# Altium PCB PCB1.PcbDoc
Units mil, origin at the board's own origin, x right, y up, seen from the top; angles counter-clockwise.
Board outline 2560 x 2200 mil, 2 copper layers (Top Layer, Bottom Layer), stack 65.792 mil thick; 31 components, 26 nets, 88 pads, 0 vias.
Unrouted connection lines stored in the file: 2.
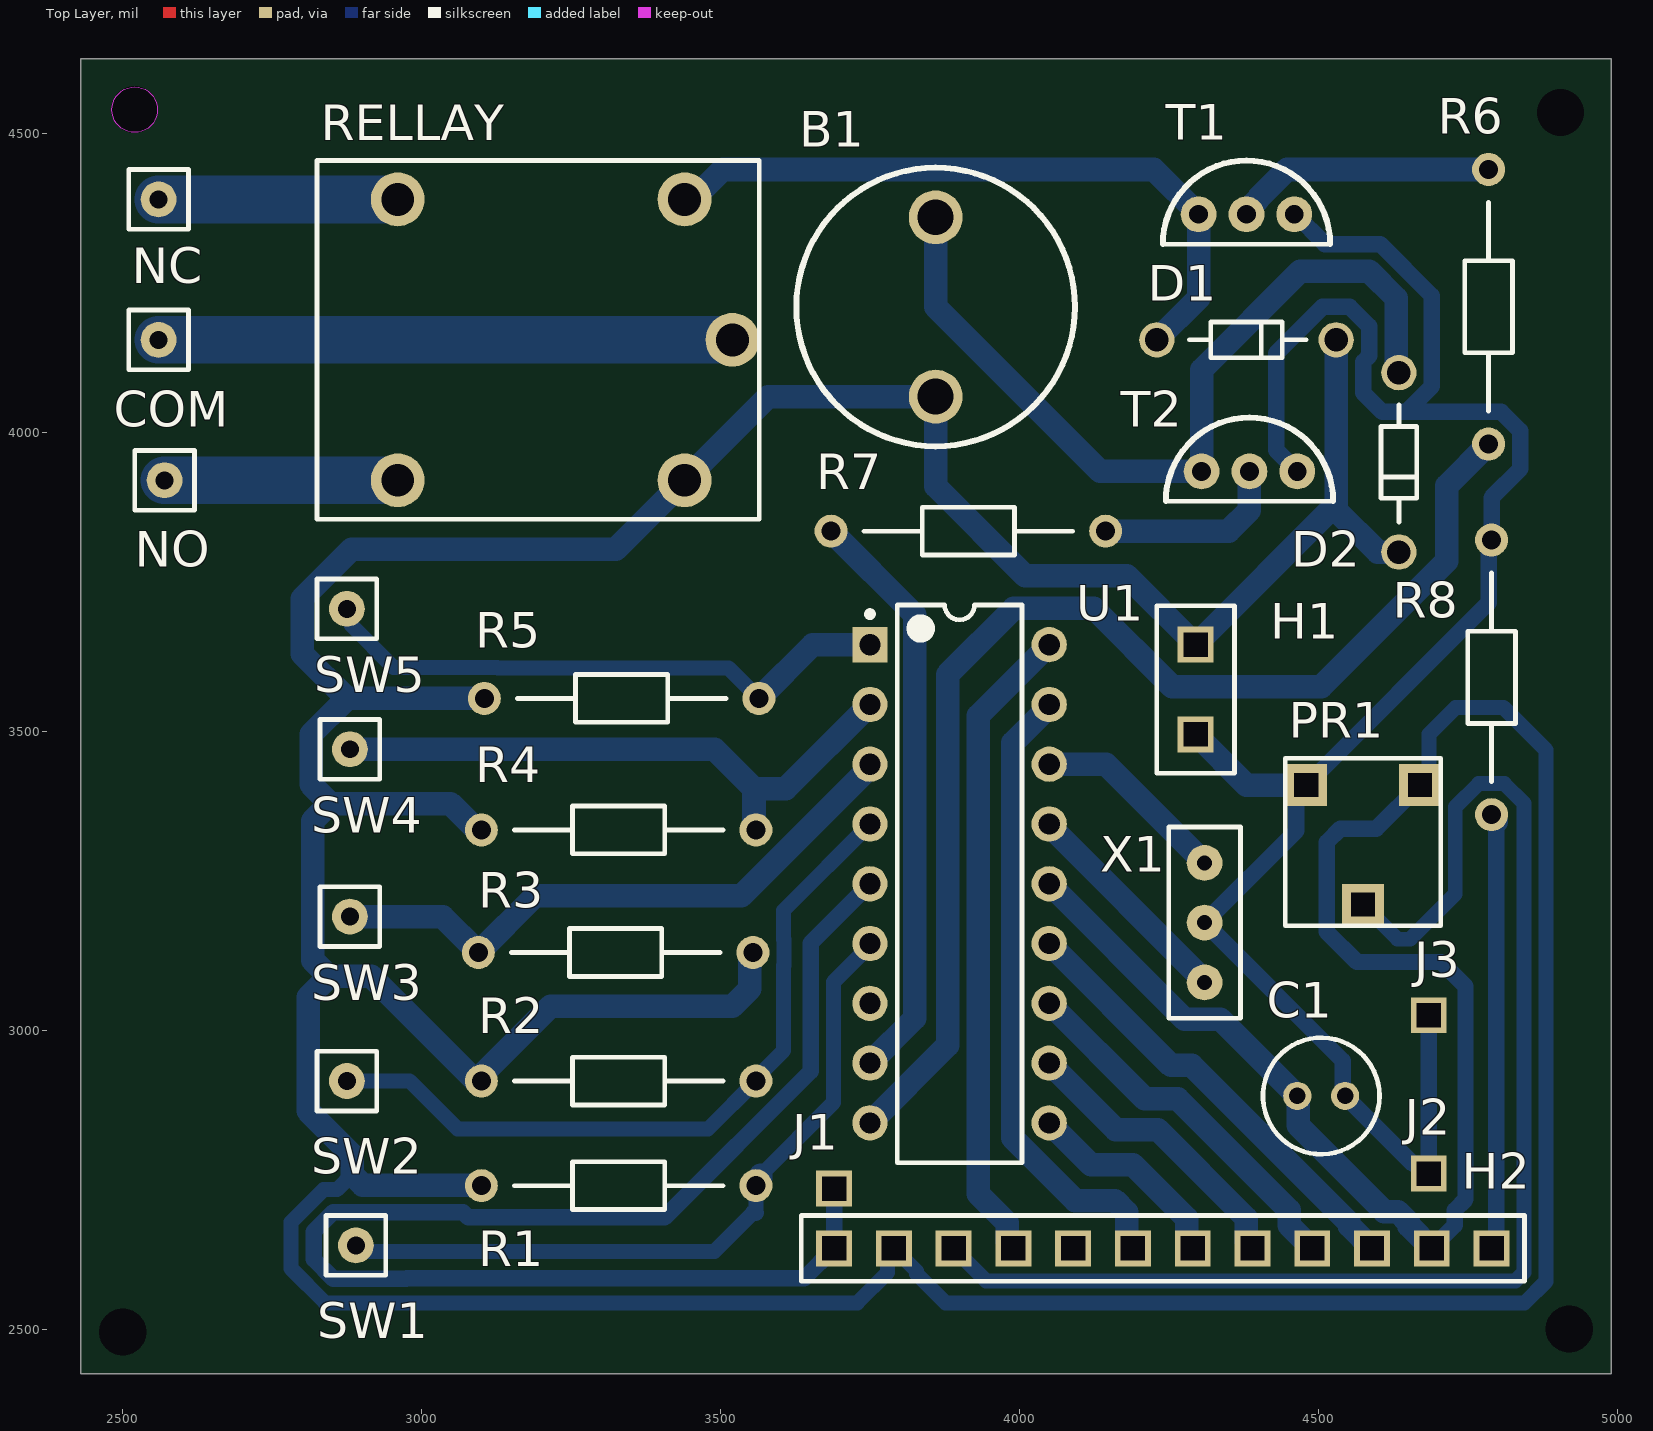
[diagram p0: Top Layer view]
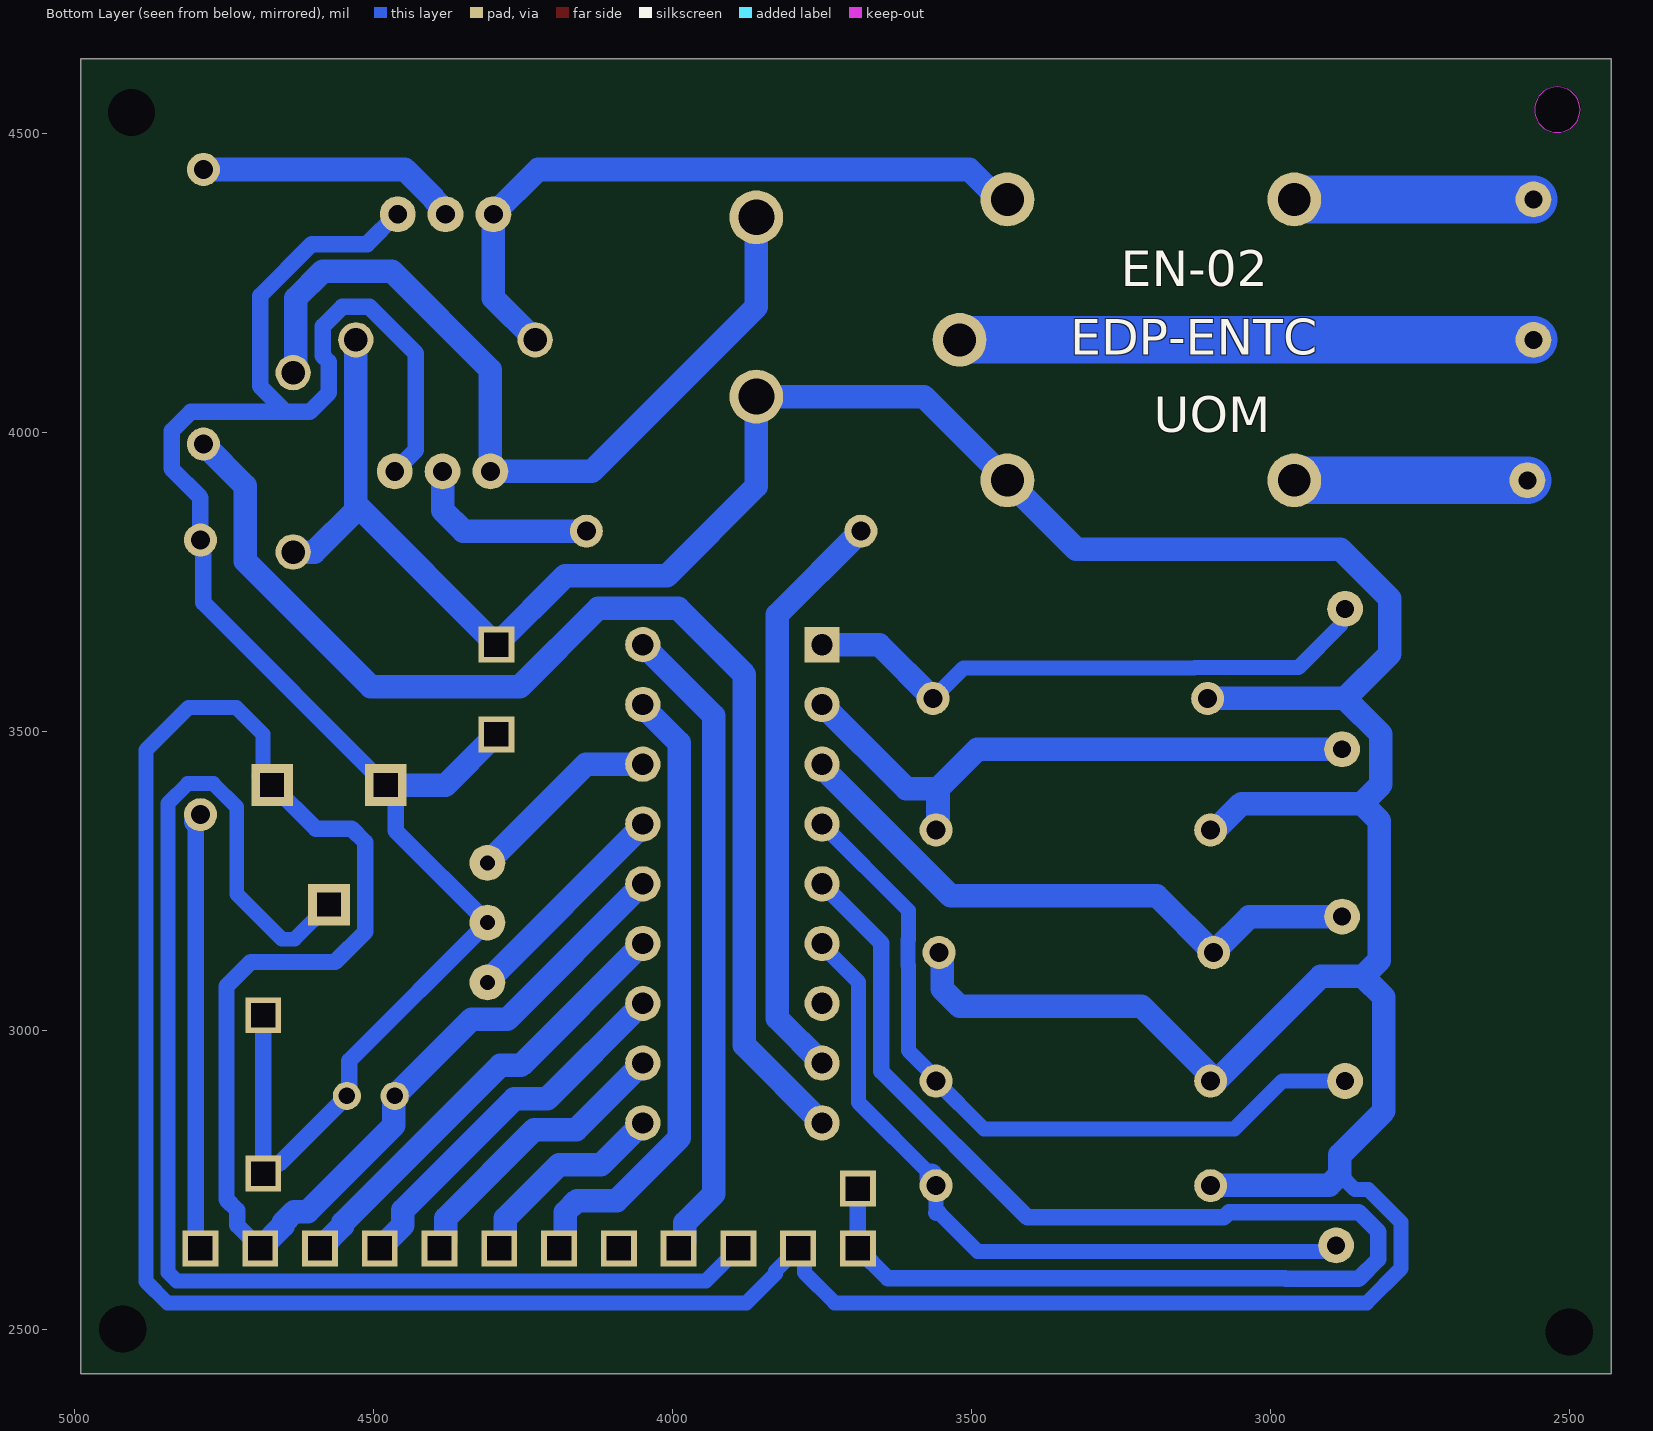
[diagram p1: Bottom Layer view, seen from below]

## Layer stack, top to bottom
Top Solder: solder mask 0.4, Solder Resist, Dk 3.5
Top Layer: signal copper 1.4
Dielectric 1: dielectric 62.9921, FR-4, Dk 4.8
Bottom Layer: signal copper 1.4
Bottom Solder: solder mask 0.4, Solder Resist, Dk 3.5

## Board outline
4990,4625 4990,2425 2430,2425 2430,4625
cut-out: 2520,4501.92 cw(c2520,4540) 2481.92,4540 cw(c2520,4540) 2520,4578.08 cw(c2520,4540) 2558.08,4540 cw(c2520,4540)
board region "Default Layer Stack Region": 4990,4625 4990,2425 2430,2425 2430,4625
board region "Layer Stack Region 1": 4990,4625 4990,2425 2430,2425 2430,4625

## Design rules (kind name [scope] priority, off if disabled: settings)
Clearance [All] p1: gap=11.81 ignorepadtopadclearanceinfootprint=FALSE
PolygonConnect [All] p1: connectstyle=Relief reliefconductorwidth=10 reliefentries=4 polygonreliefangle="90 Angle" airgapwidth=10
RoutingVias [All] p1: holewidth=28 width=50 viastyle="Through Hole" minholewidth=28 minwidth=50 maxholewidth=28 maxwidth=50
SilkToSolderMaskClearance [IsPad] p1: minsilkscreentomaskgap=3.94 clearancetoexposedcopper=TRUE
SolderMaskExpansion [All] p1: expansion=4 istentingtop=FALSE
Width [All] p1: maxlimit=80 minlimit=11.81 preferedwidth=39.37
29 further rules are at their usual default settings.

## Components (designator, comment, footprint, x,y, rotation, side; value= is the part's Value field where it differs from the comment)
B1 "BUZZER" BUZZER 3860,4210 r90 top
C1 "0.1uF" CAP0.1UF 4465,2890 r0 top
COM "switch" SW 2560,4155 r0 top (schematic designator SW8)
D1 "1N4001" DIODE 4230,4155 r0 top
D2 "1N4001" DIODE 4635,4100 r270 top
H1 "5V" 2PINHEADER 4295,3645 r270 top
H2 "DISPLAY" 12PINHEADER 3990,2635 r0 top
J1 "" JUMPER 3690,2735 r0 top
J2 "" JUMPER 4685,2760 r0 top
J3 "" JUMPER 4685,3025 r0 top
NC "switch" SW 2560,4390 r0 top (schematic designator SW7)
NO "switch" SW 2570,3920 r0 top (schematic designator SW6)
PR1 "10K" POT 4575,3210 r180 top
R1 "10K" RESI 3559.33,2740 r180 top
R2 "10K" RESI 3559.33,2915 r180 top
R3 "10K" RESI 3095,3130 r0 top
R4 "10K" RESI 3559.33,3335 r180 top
R5 "10K" RESI 3564.33,3555 r180 top
R6 "10K" RESI 4785,4440 r270 top
R7 "10K" RESI 4144.33,3835 r180 top
R8 "47R" RESI 4790,3820 r270 top (schematic designator RE8)
RELLAY "5V" RELAY 3520,4155 r90 top
SW1 "switch" SW 2890,2640 r0 top
SW2 "switch" SW 2875,2915 r0 top
SW3 "switch" SW 2880,3190 r0 top
SW4 "switch" SW 2880,3470 r0 top
SW5 "switch" SW 2875,3705 r0 top
T1 "2N2222" 2N2222 4380,4365 r180 top
T2 "2N2222" 2N2222 4385,3935 r180 top
U1 "PIC16F628A-I/P" PDIP300-P18 3900,3245 r0 top
X1 "4MHz" "RES 4MHZ" 4310,3180 r90 top

## Footprints (in the part's own frame and the unit in brackets; to place one, negate y for a bottom-side part, rotate by r counter-clockwise, add the part's x,y. Pads: shape width x height; smd on the part's side, far side on the other; paste and mask are expansions set on the pad)
2N2222 [mil]
  round 60 hole 31.5: 1(0,0) 2(80,0) 3(-80,0)
  silkscreen extent -140,-90 140,50, body extent -80,-85 80,35, height 150
2PINHEADER [mil]
  rect 60x60 hole 40 square: 1(0,0) 2(150,0)
  silkscreen extent -65,-65 215,65, body extent -50,-50 200,50, height 317
12PINHEADER [mil]
  rect 60x60 hole 40 square: 1(-300,0) 2(-200,0) 3(-100,0) 4(0,0) 5(100,0) 6(200,0) 7(300,0) 8(400,0) 9(500,0) 10(600,0) 11(700,0) 12(800,0)
  silkscreen extent -355,-55 855,55, body extent -350,-50 850,50, height 317
BUZZER [mil]
  round 90 hole 60: 1(-150,0) 2(150,0)
  silkscreen extent -233,-233 233,233, body extent -236,-235 236,237, height 375
CAP0.1UF [mm]
  round 1.2 hole 0.7: 1(0,0) 2(2.032,0)
  silkscreen extent -1.46,-2.48 3.49,2.48, body extent -1.5,-2.46 3.53,2.54, height 12.51
DIODE [mm]
  round 1.5 hole 1: A(0,0) K(7.62,0)
  silkscreen extent 1.37,-0.76 6.35,0.76, body extent -0.26,-1.27 7.88,1.26, height 1.27
JUMPER [mil]
  rect 60x60 hole 40 square: 1(0,0)
PDIP300-P18 [mm] "DIP, 18-Pin, Row Spacing 7.62 mm, Pitch 2.54 mm"
  rect 1.5x1.5 hole 0.9: 1(-3.81,10.16)
  round 1.5 hole 0.9: 2(-3.81,7.62) 3(-3.81,5.08) 4(-3.81,2.54) 5(-3.81,0) 6(-3.81,-2.54) 7(-3.81,-5.08) 8(-3.81,-7.62) 9(-3.81,-10.16) 10(3.81,-10.16) 11(3.81,-7.62) 12(3.81,-5.08) 13(3.81,-2.54) 14(3.81,0) 15(3.81,2.54) 16(3.81,5.08) 17(3.81,7.62) 18(3.81,10.16)
  silkscreen extent -3.93,-11.85 2.65,11.85, body extent -3.6,-11.8 3.6,11.8, height 5.33
POT [mil]
  rect 70x70 hole 39.37 square: 1(-95,-200) 2(0,0) 3(95,-200)
  silkscreen extent -130,-245 130,35, body extent -128,-245 128,33, height 166
RELAY [mil]
  round 90 hole 55: 1(-235,80) 2(235,80) 3(235,560) 4(0,0) 5(-235,560)
  silkscreen extent -300,-45 300,695, body extent -295,-40 295,688, height 571
"RES 4MHZ" [mil]
  round 60 hole 25: 1(-100,0) 2(0,0) 3(100,0)
  silkscreen extent -160,-60 160,60, body extent -159,-59 156,59, height 236
RESI [mm]
  round 1.4 hole 0.8: 1(0,0) 2(11.667,0)
  silkscreen extent 1.4,-1.02 10.27,1.02, body extent -0.31,-1.29 11.99,1.29, height 2.58
SW [mil]
  round 60 hole 30: 1(0,0)
  silkscreen extent -50,-50 50,50

## Part data
B1: library part CEM-1206S, "12 mm, 5 V, 85 dB, Through Hole, Sealed, Magnetic Audio Transducer Buzzer", Case/Package=Radial, Frequency=2.4kHz, Manufacturer=CUI, Max Operating Temperature=70°C, Min Operating Temperature=-30°C, Operating Supply Current=45mA, Supplier Part Number 1=CEM-1206S-TRAY, Voltage Rating=5V, Category="Audio Products", ComponentLink1Description=http://www.mouser.com/ds/2/670/cem-1206s-515977.pdf?src-supplier=Mouser, ComponentLink1URL=http://www.mouser.com/ds/2/670/cem-1206s-515977.pdf?src-supplier=Mouser, ComponentLink2Description=https://www.cui.com/product/resource/digikeypdf/cem-1206s.pdf?src-supplier=Digi-Key, ComponentLink2URL=https://www.cui.com/product/resource/digikeypdf/cem-1206s.pdf?src-supplier=Digi-Key, Diameter=12mm, Height=10mm, Lead Free="Lead Free", Manufacturer Part Number=CEM-1206S, Mount="Through Hole", Packaging=Bulk, RoHS=Yes, Self Resonant Frequency=2.4kHz, Sensing Method=Magnetic, Supplier 1="Future Electronics", Termination="PC Pins", Washable=Yes
C1: library part UKW1H0R1MDD1TD, "Cap Alum 0.1UF 20% 50V Radial", Capacitance=100nF, Case/Package=Radial, Manufacturer=Nichicon, Max Operating Temperature=85°C, Min Operating Temperature=-40°C, Package Quantity=1, Ripple Current=1.1mA, Supplier Part Number 1=493-10793-1-ND, Tolerance=20%, Voltage Rating=50V, Category="Aluminum Electrolytic Capacitors", ComponentLink1Description=https://datasheet.ciiva.com/29550/e-kw-29550927.pdf?src-supplier=Digi-Key, ComponentLink1URL=https://datasheet.ciiva.com/29550/e-kw-29550927.pdf?src-supplier=Digi-Key, Height - Seated (Max)=0.492inch, Lead Pitch=0.079inch, Life (Hours)=2000Hour, Manufacturer Part Number=UKW1H0R1MDD1TD, Mount="Through Hole", Packaging="Cut Tape", Pricing 1="1=0.39000, 10=0.26600, 50=0.17720, 100=0.15050, 500=0.10626, 1000=0.09298 (USD)", RoHS=Yes, RoHS Compliant=Yes, Stock 1=3707, Supplier 1=Digi-Key
COM NC NO SW1 SW2 SW3 SW4 SW5: library part Switch, "SWITCH PUSH SPST-NO 16A 125V"
D1 D2: "Diode Standard 50 V 1A Through Hole DO-204AL (DO-41)"
H1: library part 5VHEADER
H2: library part 12PINHEADER
J1 J2 J3: library part JUMPER
PR1: library part POT, "CARBON PRESET HA 06 SM065 10K 30"
R1 R2 R3 R4 R5 R6 R7: library part CFR-25JB-52-10K, "RES 10K OHM 5% 1/2W AXIAL", Case/Package=Axial, Manufacturer=Yageo, Max Operating Temperature=155°C, Max Power Dissipation=250mW, Min Operating Temperature=-55°C, Package Quantity=200, Resistance=10kR, Resistor Type="Carbon Film", Supplier Part Number 1=10KQBK-ND, Temperature Coefficient=500ppm/°C, Tolerance=5%, Category="Through-Hole Resistors", ComponentLink1Description=http://www.yageo.com/NewPortal/yageodocoutput?fileName=/pdf/throughhole/Yageo_LR_CFR_2013.pdf&src-supplier=Digi-Key, ComponentLink1URL=http://www.yageo.com/NewPortal/yageodocoutput?fileName=/pdf/throughhole/Yageo_LR_CFR_2013.pdf&src-supplier=Digi-Key, Lead Free="Lead Free", Length=0.248inch, Manufacturer Part Number=CFR-25JB-52-10K, Number of Terminations=2, Packaging=Bulk, Pricing 1="1=0.10000, 10=0.06800, 25=0.04680, 50=0.03640, 100=0.02600, 250=0.02028, 500=0.01612, 1000=0.01144, 5000=0.00884 (USD)", RoHS=Yes, RoHS Compliant=Yes, Series="Carbon Film", Stock 1=199228, Supplier 1=Digi-Key
R8: library part CFR-25JB-52-47R, "RES 47 OHM 5% 1/4W AXIAL", Case/Package=Axial, Manufacturer=Yageo, Max Operating Temperature=155°C, Max Power Dissipation=250mW, Min Operating Temperature=-55°C, Package Quantity=200, Resistor Type="Carbon Film", Supplier Part Number 1=47QBK-ND, Temperature Coefficient=500ppm/°C, Tolerance=5%, Category="Through-Hole Resistors", ComponentLink1Description=http://www.yageo.com/NewPortal/yageodocoutput?fileName=/pdf/throughhole/Yageo_LR_CFR_2013.pdf&src-supplier=Digi-Key, ComponentLink1URL=http://www.yageo.com/NewPortal/yageodocoutput?fileName=/pdf/throughhole/Yageo_LR_CFR_2013.pdf&src-supplier=Digi-Key, Lead Free="Lead Free", Length=0.248inch, Manufacturer Part Number=CFR-25JB-52-47R, Number of Terminations=2, Packaging=Bulk, Pricing 1="1=0.10000, 10=0.06800, 25=0.04680, 50=0.03640, 100=0.02600, 250=0.02028, 500=0.01612, 1000=0.01144, 5000=0.00884 (USD)", Resistance=47R, RoHS=Yes, RoHS Compliant=Yes, Series="Carbon Film", Stock 1=40208, Supplier 1=Digi-Key
RELLAY: library part J1021AS55VDC.45, "RELAY GEN PURPOSE SPST 5A 5V", Manufacturer="CIT Relay & Switch", Supplier Part Number 1=2449-J1021AS55VDC.45-ND, Manufacturer Part Number=J1021AS55VDC.45, Pricing 1="1=1.06000, 10=0.99200, 25=0.88200, 50=0.83800, 100=0.79380, 250=0.70560, 450=0.66151, 950=0.61740, 9800=0.58653 (USD)", RoHS=No, Stock 1=1912, Supplier 1=Digi-Key
T1 T2: "TRANS NPN 30V 0.8A TO18", Case/Package=TO-18, Manufacturer="ON Semiconductor / Fairchild", Supplier Part Number 1=2N2222-DIE-ND, Category=BJTs, ComponentLink1Description=https://datasheet.ciiva.com/14850/38228mot-14850663.pdf?src-supplier=Arrow+Electronics, ComponentLink1URL=https://datasheet.ciiva.com/14850/38228mot-14850663.pdf?src-supplier=Arrow+Electronics, Lead Free="Contains Lead", Manufacturer Part Number=2N2222, Number of Pins=3, Packaging=Bulk, RoHS=No, RoHS Compliant=No, Supplier 1=Digi-Key
U1: library part MC-8B-16F627A-IL18, "FLASH-Based 8-Bit CMOS Microcontroller with nanoWatt Technology, 2K (x14-Bit words) FLASH, 224 Bytes SRAM, 18-Pin PDIP, 3.0 to 5.5V Supply Range, Industrial Temperature", Code_JEDEC=MS-001, DatasheetVersion="revF, Mar-2007", PackageDescription="18-Lead Plastic Dual In-Line (P) - 300 mil Body [PDIP]", PackageReference=PDIP300-P18, PackageVersion="revBB, Aug-2009"
X1: library part CSTLS4M00G53-B0, "CER RES 4.0000MHZ 15PF T/H", Capacitance=15pF, Case/Package=Radial, Frequency Stability=0.2%, Frequency Tolerance=0.5%, Manufacturer=Murata, Max Operating Temperature=80°C, Min Operating Temperature=-20°C, Operating Frequency="4 MHz", Package Quantity=500, Resistor Type=Ceramic, Supplier Part Number 1=490-1208-ND, Category=Capacitors, ComponentLink1Description=https://datasheet.ciiva.com/19454/1852096-19454652.pdf?src-supplier=Jameco, ComponentLink1URL=https://datasheet.ciiva.com/19454/1852096-19454652.pdf?src-supplier=Jameco, ComponentLink2Description=https://datasheet.ciiva.com/18026/getdatasheetpartid-104166-18026389.pdf?src-supplier=Verical, ComponentLink2URL=https://datasheet.ciiva.com/18026/getdatasheetpartid-104166-18026389.pdf?src-supplier=Verical, ComponentLink3Description=https://datasheet.ciiva.com/46434/45562-46434823.pdf?src-supplier=Element14, ComponentLink3URL=https://datasheet.ciiva.com/46434/45562-46434823.pdf?src-supplier=Element14, ComponentLink4Description=https://datasheet.ciiva.com/884/p16e-884528.pdf?src-supplier=Digi-Key, ComponentLink4URL=https://datasheet.ciiva.com/884/p16e-884528.pdf?src-supplier=Digi-Key, ComponentLink5Description=https://datasheet.ciiva.com/16427/p16e-16427178.pdf?src-supplier=Future+Electronics, ComponentLink5URL=https://datasheet.ciiva.com/16427/p16e-16427178.pdf?src-supplier=Future+Electronics, Contact Plating=Copper,Tin, Frequency=4MHz, Height=0.236inch, Impedance=30R, Lead Free="Lead Free", Length=0.315inch, Load Capacitance=15pF, Manufacturer Part Number=CSTLS4M00G53-B0, Mount="Through Hole", Number of Pins=3, Packaging=Bulk, Pricing 1="1=0.20000, 10=0.16300, 50=0.14640, 100=0.13010, 500=0.12358, 1000=0.10407, 2500=0.09757, 5000=0.09431, 10000=0.09106 (USD)", REACH SVHC="No SVHC", RoHS=Yes, RoHS Compliant=Yes, Self Resonant Frequency=4MHz, Series=CERALOCK®, Stock 1=14887, Supplier 1=Digi-Key, Termination="Through Hole", Tolerance=0.5%, Width=0.118inch

## Free pads (board coordinates)
  round 0 hole 78.74: 4(2520,4540) 5(4905,4535) 6(2500,2495) 7(4920,2500)

## Nets (pads, with @x,y where several pads share a name; then routed paths per layer and width w, separated by ;. In a path a pad name is that pad's centre, name@x,y a point inside that pad or via, vN(x,y) a via of type N, cw(c..) or ccw(c..) an arc to the next point about the centre after c; other vN are vias at no path point)
+5V5: B1.1 C1.1 D1.K D2.K H1.1 H2.2 H2.11 PR1.1 R1.2 R2.2 R3.2 R4.2 R5.2 RELLAY.1 U1.14 | length 11047.7
  Bottom Layer w25: 2883.69,2758.69 2858.68,2733.68 2836.2,2733.68 2781.32,2678.8 2781.32,2601.2 2838.64,2543.88 3728.88,2543.88 3779.69,2594.69 H2.2@3779.69,2624.69 ; H2.2 3828.15,2596.85 3828.15,2592.3 3876.58,2543.88 4845.32,2543.88 4881.12,2579.68 4881.12,3468.88 4810,3540 4730,3540 4685.31,3495.31 PR1.1@4685.31,3425.31
  Bottom Layer w27.37: PR1.1 4597.34,3337.34 4537.4,3337.34 4514.5,3314.45 4514.5,3164.44 4564.79,3114.15 4705.85,3114.15 4746.5,3073.5 4746.5,2716.95 4728.5,2698.96 4728.5,2673.5 H2.11
  Bottom Layer w27.56: R4.2@3092.54,3335 R4.2 ; R3.2@3549.06,3124.73 R3.2
  Bottom Layer w39.37: R4.2@3092.54,3335 3048.3,3379.25 2846.9,3379.25 ; R1.2 3099.13,2740.87 2901.52,2740.87 2883.69,2758.69 2883.69,2791.31 2810,2865 2810,3055 2845,3090 ; R5.2 2875,3555 ; R3.2@3549.06,3124.73 3549.06,3069.06 3520,3040 3215.67,3040 3090.67,2915 2915.67,3090 2845,3090 ; H2.2@3779.69,2624.69 H2.2 ; U1.14 4276.5,3018.5 4336.5,3018.5 C1.1 4466.51,2888.49 4466.51,2840.65 4610.66,2696.5 4633.05,2696.5 4651.85,2677.7 4651.85,2673.15 H2.11 ; D1.K 4530,3880 ; D2.K 4600,3800 4530,3870 4530,3880 ; PR1.1 PR1.1@4685.31,3425.31 ; 2845,3090 2817.65,3117.35 2817.65,3350 2846.9,3379.25 ; 2846.9,3379.25 2815,3411.14 2815,3495 2875,3555 ; 2875,3555 2800,3630 2800,3721.94 2883.06,3805 3325,3805 3580,4060 B1.1 3860,3910 4010,3760 4180,3760 H1.1 4530,3880
GND: C1.2 H1.2 H2.1 H2.5 J1.1 J2.1 J3.1 PR1.3 R8.1 T1.3 T2.3 U1.5 X1.2 | length 5816.2
  Top Layer w27.56: U1.5@3749.41,3245.59 U1.5 ; T1.3 T1.3@4462.5,4362.5 ; T2.3@4462.5,3937.5 T2.3 ; PR1.3@4463.66,3393.66 PR1.3 ; C1.2@4541.23,2893.77 C1.2
  Bottom Layer w27.56: J1.1 H2.1 3640,2585 2975,2585 2974.41,2584.41 2851.97,2584.41 2819.41,2616.97 2819.41,2663.03 2851.97,2695.59 3069.24,2695.59 3077.98,2686.85 3406.35,2686.85 3650.89,2931.39 3650.89,3145.89 U1.5 ; T1.3 4461.44,4365 4511.16,4315.28 4603.75,4315.28 4690.12,4228.91 4690.12,4077.17 4647.41,4034.47 ; T2.3 4430,3970 4430,4132.95 4507.17,4210.12 4552.83,4210.12 4585.12,4177.83 4585.12,4128.07 4575.28,4118.22 4575.28,4066.25 4607.06,4034.47 4647.41,4034.47 ; J3.1 J2.1 4668.78,2776.22 4658.78,2776.22 C1.2 4541.23,2893.77 4541.23,2948.77 X1.2 4463.66,3333.66 4463.66,3393.66 PR1.3 4785,3715 4785,3815 R8.1 4790,3891 4838.15,3939.15 4838.15,4002.68 4806.37,4034.47 4647.41,4034.47
  Bottom Layer w39: H1.2 4380,3410 PR1.3
NetB1_2: B1.2 D2.A T2.2 | length 1421.9
  Bottom Layer w39.37: B1.2 3860,4210 4135,3935 T2.2 4305,4105 4470,4270 4585,4270 4630.39,4224.61 4630.39,4118.53 4631.23,4117.69 4631.23,4095.68 D2.A@4630.39,4094.84
NetD1_2: D1.A RELLAY.2 T1.2 | length 1150.8
  Bottom Layer w39.37: RELLAY.2 3453.7,4390 3503.7,4440 4225,4440 T1.2 4300,4225 D1.A
NetH2_3: H2.3 PR1.2 | length 2267.4
  Bottom Layer w25: H2.3 3944.31,2580.69 4830.07,2580.69 4844.31,2594.93 4844.31,3379.71 4811.49,3412.54 4768.51,3412.54 4729.31,3373.34 4729.31,3227.89 4653.57,3152.14 4632.86,3152.14 PR1.2
NetH2_4: H2.4 U1.18 | length 1086.8
  Bottom Layer w39.37: H2.4 3979.69,2645.31 3979.69,2677.68 3931.18,2726.18 3931.18,3526.18 U1.18 U1.18@4050,3641.77
NetH2_6: H2.6 U1.17 | length 1057.4
  Bottom Layer w39.37: U1.17 4050,3541.77 3988.98,3480.75 3988.98,2819.72 4093.7,2715 4160,2715 4179.69,2695.31 4179.69,2645.31 H2.6
NetH2_7: H2.7 U1.10 | length 350.4
  Bottom Layer w39.37: U1.10 4120,2775 4190,2775 4279.69,2685.31 4279.69,2645.31 H2.7
NetH2_8: H2.8 U1.11 | length 492
  Bottom Layer w39.37: U1.11 4161.18,2833.82 4231.42,2833.82 4379.69,2685.55 4379.69,2645.31 H2.8
NetH2_9: H2.9 U1.12 | length 624.5
  Bottom Layer w39.37: U1.12 4210,2885 4265,2885 4451.5,2698.5 4451.5,2673.5 H2.9
NetH2_10: H2.10 U1.13 | length 753.9
  Bottom Layer w39.37: U1.13 4253.82,2941.18 4288.36,2941.18 4551.85,2677.7 4551.85,2673.15 H2.10
NetH2_12: H2.12 R8.2 | length 732
  Bottom Layer w27.37: H2.12@4797.68,2642.68 R8.2@4797.68,3348.73
  Bottom Layer w39.37: H2.12 H2.12@4797.68,2642.68 ; R8.2 4790,3356.41 R8.2@4797.68,3348.73
NetR1_1: R1.1 SW1.1 U1.6 | length 1229.4
  Bottom Layer w25: SW1.1 2900,2630 3490,2630 3555,2695 ; 3559.33,2695 R1.1 R1.1@3559.33,2744.26 ; R1.1@3567.2,2757.2 3688.98,2878.98 3688.98,3080.75 U1.6@3750,3141.77
  Bottom Layer w27.56: 3555,2695 3559.33,2695
  Bottom Layer w39.37: R1.1@3559.33,2744.26 3567.2,2752.14 R1.1@3567.2,2757.2 ; U1.6@3750,3141.77 U1.6
NetR2_1: R2.1 SW2.1 U1.4 | length 1260.1
  Bottom Layer w25: SW2.1 2980,2915 3060,2835 3479.33,2835 R2.1 ; R2.1@3559.33,2919.84 3605.63,2966.14 3605.63,3107.94 3606.2,3108.51 3606.2,3151.49 3605.63,3152.06 3605.63,3200.63 U1.4
  Bottom Layer w27.56: R2.1 R2.1@3559.33,2919.84
NetR3_1: R3.1 SW3.1 U1.3 | length 1028.3
  Bottom Layer w27.56: U1.3@3750,3440 U1.3
  Bottom Layer w39.37: SW3.1 3035,3190 R3.1 3190,3225 3535,3225 U1.3@3750,3440
NetR4_1: R4.1 SW4.1 U1.2 | length 1026.1
  Bottom Layer w27.56: R4.1@3556.1,3338.23 R4.1
  Bottom Layer w39.37: SW4.1 3490,3470 3556.1,3403.9 ; R4.1@3556.1,3338.23 3556.1,3403.9 ; U1.2 3608.9,3403.9 3556.1,3403.9
NetR5_1: R5.1 SW5.1 U1.1 | length 986.1
  Bottom Layer w25: SW5.1 2881.7,3698.3 2881.7,3678.3 2953.13,3606.87 3126.49,3606.87 3127.35,3606 3513.33,3606 R5.1
  Bottom Layer w39.37: R5.1 3654.33,3645 U1.1
NetR6_1: R6.1 T1.1 | length 440.1
  Bottom Layer w39.37: T1.1 4380,4370.58 4398.5,4389.09 4398.5,4390.47 4448.03,4440 R6.1
NetR6_2: R6.2 U1.9 | length 2050.8
  Bottom Layer w39.37: U1.9 3880,2975 3880,3595 3991.02,3706.02 4124.43,3706.02 4255.46,3575 4505,3575 4715,3785 4715,3910.67 R6.2
NetR7_1: R7.1 T2.1 | length 320.2
  Bottom Layer w39.37: R7.1 4350,3835 4385,3870 T2.1
NetR7_2: R7.2 U1.8 | length 979.1
  Bottom Layer w39.37: R7.2 3825,3695 3825,3020 U1.8
NetRELLAY_3: NC.1 RELLAY.3 | length 400
  Bottom Layer w80: NC.1 RELLAY.3
NetRELLAY_4: COM.1 RELLAY.4 | length 960
  Bottom Layer w80: COM.1 RELLAY.4
NetRELLAY_5: NO.1 RELLAY.5 | length 400
  Top Layer w39.37: RELLAY.5 RELLAY.5@2960,3930
  Bottom Layer w80: NO.1 RELLAY.5
NetU1_15: U1.15 X1.1 | length 372.7
  Bottom Layer w39.37: U1.15 4050,3342.5 4310,3082.5 X1.1
NetU1_16: U1.16 X1.3 | length 328.3
  Bottom Layer w39.37: U1.16 4145,3445 X1.3
pads on no net: U1.7

## Silkscreen, mask and mechanical layers (free items; w line width, h text height)
Bottom Overlay:
  text "EN-02" at 3250,4245 h60
  text "EDP-ENTC" at 3335,4130 h60
  text "UOM" at 3195,4000 h60
Board:
  circle w0: c2520,4540 r38.08
  circle w0: c2520,4540 r35.36
  lines w7.87: 2430,2430 2430,4625 4990,4625 4990,2430 2430,2430

## Text inside footprints (layer, text, board x,y; h text height)
H2: Top Assembly "7" at 4278.19,2717.29 h35.43; Top Assembly "8" at 4378.19,2717.29 h35.43; Top Assembly "9" at 4478.19,2717.29 h35.43; Top Assembly "10" at 4563.43,2717.29 h35.43; Top Assembly "11" at 4669.34,2717.29 h35.43; Top Assembly "12" at 4763.43,2717.29 h35.43; Top Assembly "1" at 3684.1,2717.29 h35.43; Top Assembly "2" at 3778.19,2717.29 h35.43; Top Assembly "3" at 3878.19,2717.29 h35.43; Top Assembly "4" at 3978.19,2717.29 h35.43; Top Assembly "5" at 4078.19,2717.29 h35.43; Top Assembly "6" at 4178.19,2717.29 h35.43